# Altium PCB RP2040_Instant_Tankless_Water_Heater.pcbdoc
Units mm, origin at the board's own origin, x right, y up, seen from the top; angles counter-clockwise.
Board outline 485.61 x 177.75 mm, 2 copper layers (Top Layer, Bottom Layer); 102 components, 83 nets, 397 pads, 33 vias.
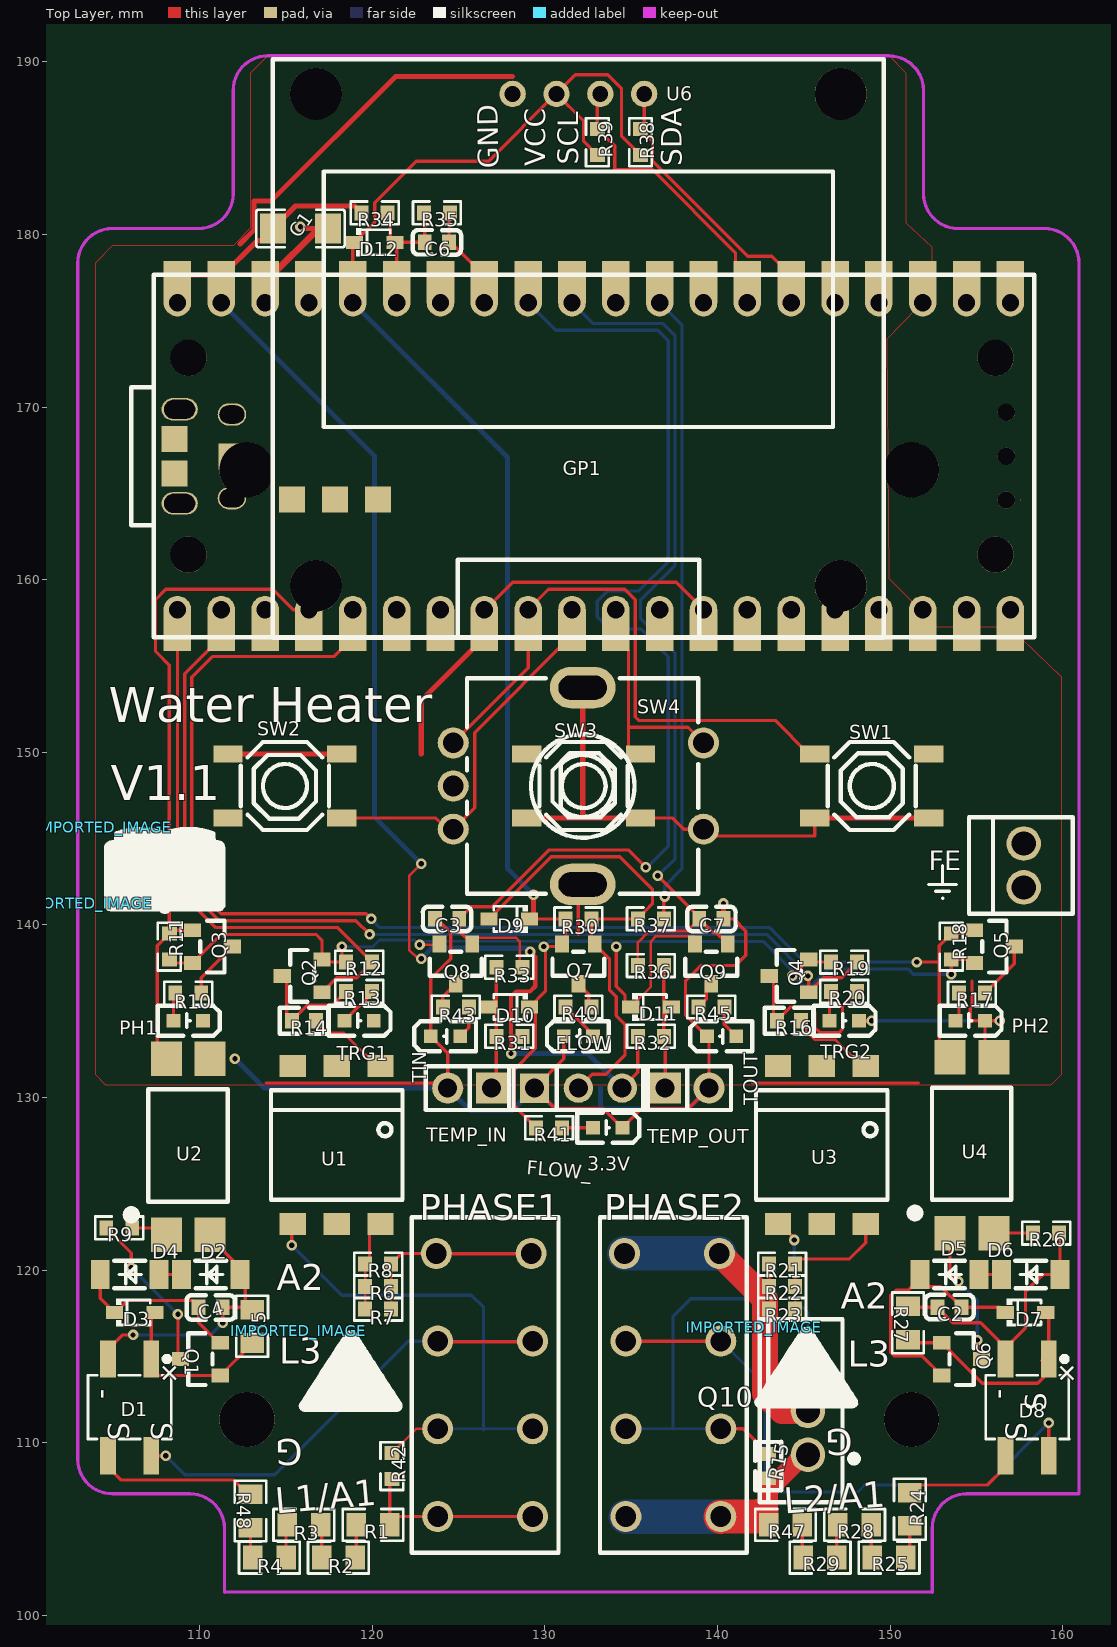
[diagram p0: Top Layer view]
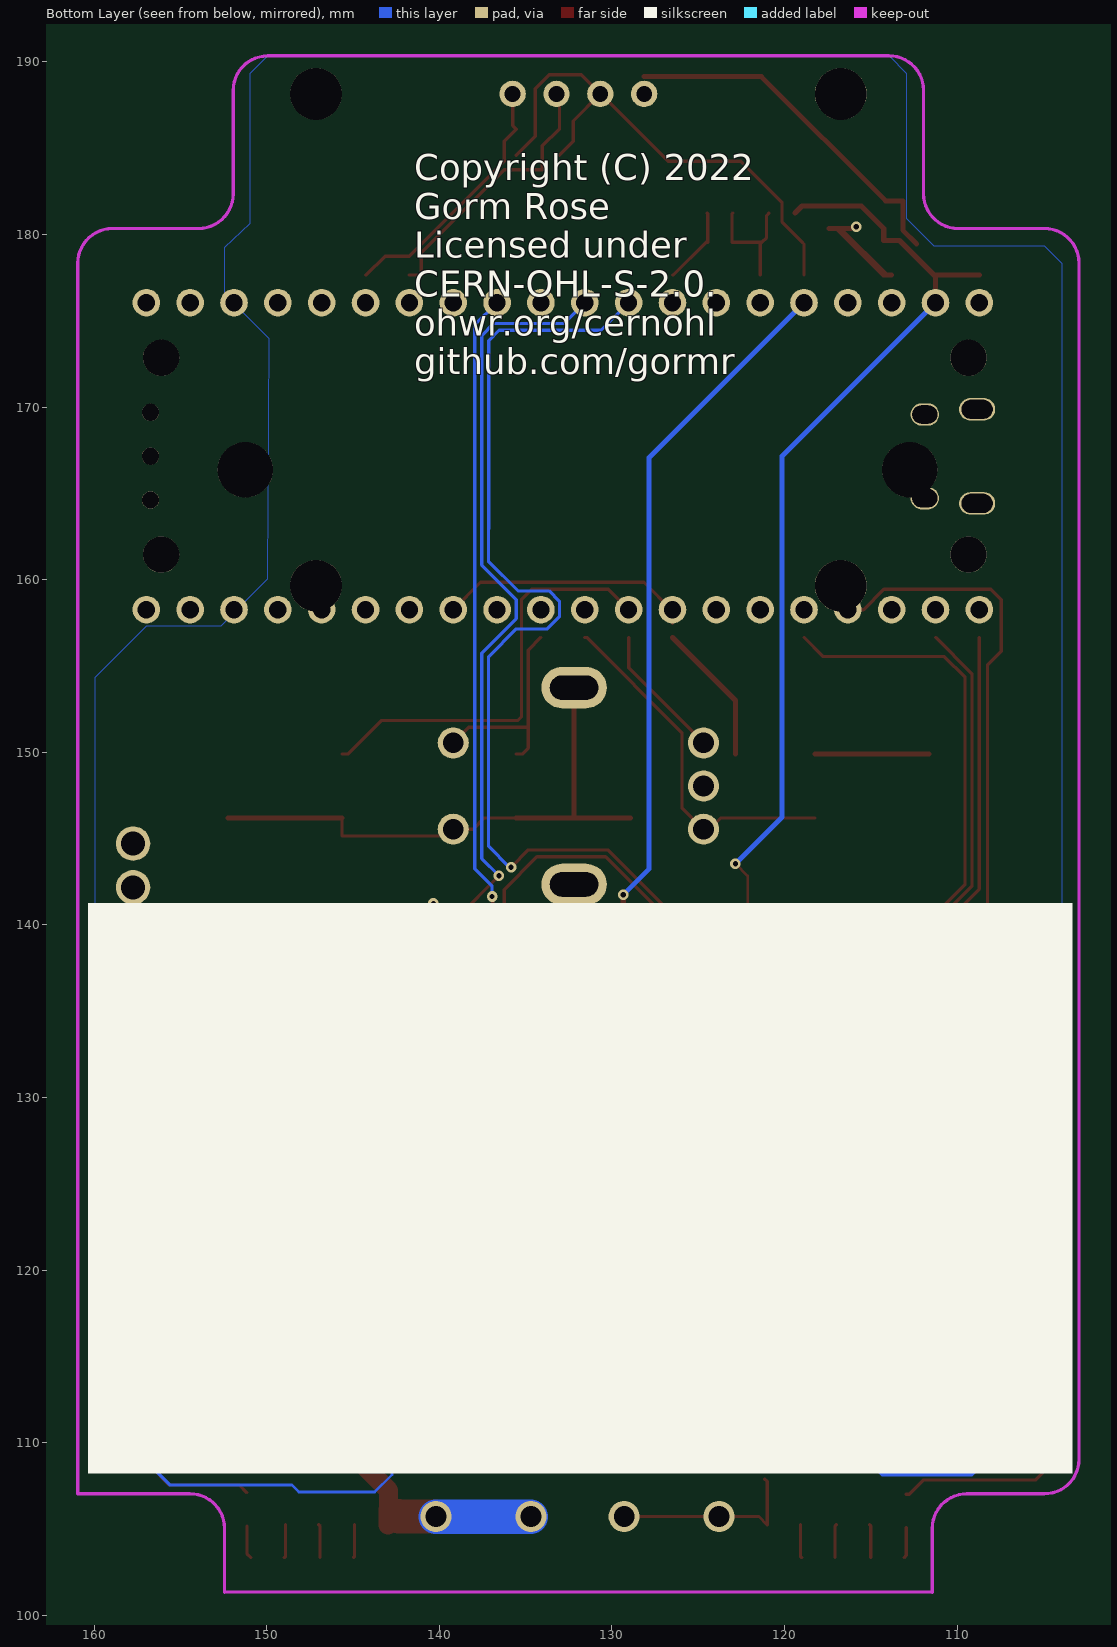
[diagram p1: Bottom Layer view, seen from below]

## Layer stack, top to bottom
Top Layer: signal copper (thickness not stored)
Dielectric: dielectric 0.32, FR-4, Dk 4.8
Bottom Layer: signal copper (thickness not stored)

## Board outline
511.014,25.4 25.4,25.4 25.4,203.148 511.014,203.148

## Components (designator, comment, footprint, x,y, rotation, side; value= is the part's Value field where it differs from the comment)
3.3V "0603White light_C2290" LED0603-R-RD_WHITE 133.643,128.25 r180 top
C1 "100uF" C1206 115.842,180.349 r180 top
C2 "100n" C0603 153.442,117.849 r0 top
C3 "100nF" C0603 124.342,140.349 r0 top
C4 "100n" C0603 110.642,117.849 r180 top
C6 "100nF" C0603 123.742,179.549 r180 top
C7 "100nF" C0603 139.642,140.349 r180 top
D1 "MB10F-46" MBF_L4.8-W3.9-P2.50-LS6.7-BL 105.942,112.049 r180 top
D2 "ZMM5V6" LL-34_L3.5-W1.5-RD 110.642,119.749 r0 top
D3 "1N5819WS" SOD-323_L1.8-W1.3-LS2.5-RD 106.242,117.549 r0 top
D4 "ZMM5V6" LL-34_L3.5-W1.5-RD 105.942,119.749 r0 top
D5 "ZMM5V6" LL-34_L3.5-W1.5-RD 153.442,119.749 r0 top
D6 "ZMM5V6" LL-34_L3.5-W1.5-RD 158.142,119.749 r0 top
D7 "1N5819WS" SOD-323_L1.8-W1.3-LS2.5-RD 157.842,117.549 r0 top
D8 "MB10F-46" MBF_L4.8-W3.9-P2.50-LS6.7-BL 157.942,112.049 r180 top
D9 "1N5819WS" SOD-323_L1.8-W1.3-LS2.5-RD 127.942,140.349 r180 top
D10 "1N5819WS" SOD-323_L1.8-W1.3-LS2.5-RD 127.942,135.249 r180 top
D11 "1N5819WS" SOD-323_L1.8-W1.3-LS2.5-RD 136.142,135.249 r0 top
D12 "1N5819WS" SOD-323_L1.8-W1.3-LS2.5-RD 120.142,179.549 r0 top
FE "Screw_Terminal_1x01" 640454-2P 157.742,143.449 r90 top
FLOW "19-213/Y2C-CQ2R2L/3T(CY)" LED0603-R-RD 131.941,133.548 r0 top
FLOW_ "A2541WV-3P_C609572" HDR-TH_3P-P2.54-V-M 131.941,130.549 r0 top
GP1 "RASPBERRY PI PICO" "RASPBERRY PI PICO" 158.342,156.649 r90 top
IMPORTED_IMAGE "IMPORTED_IMAGE" IMPORTED_IMAGE 103.342,141.249 r0 top
IMPORTED_IMAGE "IMPORTED_IMAGE" IMPORTED_IMAGE 115.742,116.499 r0 top
IMPORTED_IMAGE "IMPORTED_IMAGE" IMPORTED_IMAGE 142.142,116.699 r0 top
IMPORTED_IMAGE "IMPORTED_IMAGE" IMPORTED_IMAGE 104.487,145.654 r0 top
PH1 "19-213/Y2C-CQ2R2L/3T(CY)" LED0603-R-RD 109.343,134.448 r180 top
PH2 "19-213/Y2C-CQ2R2L/3T(CY)" LED0603-R-RD 154.641,134.448 r180 top
PHASE1 "LSF-SMT_5.08_04_180" LSF-SMT_5.08_04_180 126.542,113.349 r180 top
PHASE2 "LSF-SMT_5.08_04_180" LSF-SMT_5.08_04_180 137.442,113.349 r180 top
Q1 "LBSS84LT1G" SOT-23_L2.9-W1.3-P1.90-LS2.4-BR 110.042,114.849 r0 top
Q2 "LBSS84LT1G" SOT-23_L2.9-W1.3-P1.90-LS2.4-BR 115.942,137.049 r0 top
Q3 "LBSS84LT1G" SOT-23_L2.9-W1.3-P1.90-LS2.4-BR 110.742,138.749 r180 top
Q4 "LBSS84LT1G" SOT-23_L2.9-W1.3-P1.90-LS2.4-BR 144.142,137.049 r0 top
Q5 "LBSS84LT1G" SOT-23_L2.9-W1.3-P1.90-LS2.4-BR 156.042,138.749 r180 top
Q6 "LBSS84LT1G" SOT-23_L2.9-W1.3-P1.90-LS2.4-BR 154.142,114.849 r180 top
Q7 "LBSS84LT1G" SOT-23_L2.9-W1.3-P1.90-LS2.4-BR 131.942,137.749 r90 top
Q8 "LBSS84LT1G" SOT-23_L2.9-W1.3-P1.90-LS2.4-BR 124.842,137.749 r90 top
Q9 "LBSS84LT1G" SOT-23_L2.9-W1.3-P1.90-LS2.4-BR 139.642,137.749 r90 top
Q10 "(external or aux)" PG-TO220-3_L10.0-W4.5-P2.54-L 145.242,111.849 r90 top
R1 "220kΩ" R0805 120.042,105.249 r180 top
R2 "220kΩ" R0805 118.042,103.349 r180 top
R3 "220kΩ" R0805 116.042,105.249 r180 top
R4 "220kΩ" R0805 114.042,103.349 r180 top
R5 "220kΩ" R0805 113.042,116.749 r270 top
R6 "1kΩ" R0603#1 120.342,119.049 r180 top
R7 "1kΩ" R0603#1 120.342,117.749 r180 top
R8 "1kΩ" R0603#1 120.342,120.349 r180 top
R9 "1kΩ" R0603#1 105.342,122.449 r180 top
R10 "2.2kΩ" R0603#1 109.342,136.049 r0 top
R11 "10kΩ" R0603#1 108.242,138.749 r270 top
R12 "10kΩ" R0603#1 119.242,137.849 r0 top
R13 "2.2kΩ" R0603#1 119.242,136.149 r180 top
R14 "220R" R0603#2 116.042,134.449 r180 top
R15 "1k" R0603#2 142.942,108.649 r270 top
R16 "220R" R0603#2 144.142,134.449 r180 top
R17 "2.2kΩ" R0603#1 154.742,136.049 r0 top
R18 "10kΩ" R0603#1 153.542,138.749 r270 top
R19 "10kΩ" R0603#1 147.342,137.849 r0 top
R20 "2.2kΩ" R0603#1 147.342,136.149 r0 top
R21 "1kΩ" R0603#1 143.742,120.349 r0 top
R22 "1kΩ" R0603#1 143.742,119.049 r0 top
R23 "1kΩ" R0603#1 143.742,117.749 r0 top
R24 "220kΩ" R0805 151.142,106.149 r90 top
R25 "220kΩ" R0805 149.942,103.349 r0 top
R26 "1kΩ" R0603#1 159.042,122.149 r180 top
R27 "220kΩ" R0805 151.042,116.949 r270 top
R28 "220kΩ" R0805 147.942,105.249 r0 top
R29 "220kΩ" R0805 145.942,103.349 r0 top
R30 "2.2kΩ" R0603#1 131.942,140.349 r0 top
R31 "39kΩ" R0603#1 127.943,133.548 r0 top
R32 "39kΩ" R0603#1 136.142,133.548 r0 top
R33 "10kΩ" R0603#1 127.942,137.549 r0 top
R34 "10kΩ" R0603#1 120.142,181.249 r180 top
R35 "10kΩ" R0603#1 123.742,181.249 r180 top
R36 "10kΩ" R0603#1 136.142,137.649 r180 top
R37 "10kΩ" R0603#1 136.142,140.349 r0 top
R38 "2.2kΩ" R0603#1 135.542,185.349 r270 top
R39 "2.2kΩ" R0603#1 133.042,185.349 r270 top
R40 "2.2kΩ" R0603#1 131.942,135.249 r0 top
R41 "2.2kΩ" R0603#1 130.242,128.249 r180 top
R42 "1kΩ" R0603#1 121.142,108.649 r270 top
R43 "2.2kΩ" R0603#1 124.842,135.249 r180 top
R45 "2.2kΩ" R0603#1 139.642,135.249 r180 top
R47 "220kΩ" R0805 143.942,105.249 r0 top
R48 "220kΩ" R0805 112.942,106.049 r90 top
SW1 "TS-1187A-B-A-B" SW-SMD_4P-L5.1-W5.1-P3.70-LS6.5-TL-2 148.942,148.049 r180 top
SW2 "TS-1187A-B-A-B" SW-SMD_4P-L5.1-W5.1-P3.70-LS6.5-TL-2 114.942,148.049 r0 top
SW3 "TS-1187A-B-A-B" SW-SMD_4P-L5.1-W5.1-P3.70-LS6.5-TL-2 132.242,148.049 r180 top
SW4 "PEC11R-4015F-S0024" SW-TH_PEC11R-4XXXF-SXXXX 131.942,148.049 r270 top
TEMP_IN "A2541WV-2P" HDR-TH_P2.54-H-M_A2541WV-2P 125.642,130.549 r180 top
TEMP_OUT "A2541WV-2P" HDR-TH_P2.54-H-M_A2541WV-2P 138.243,130.549 r0 top
TIN "19-213/Y2C-CQ2R2L/3T(CY)" LED0603-R-RD 124.243,133.548 r0 top
TOUT "19-213/Y2C-CQ2R2L/3T(CY)" LED0603-R-RD 140.242,133.548 r0 top
TRG1 "XL-1608UOC-06" LED0603-R-RD_ORANGE 119.241,134.448 r180 top
TRG2 "XL-1608UOC-06" LED0603-R-RD_ORANGE 147.341,134.448 r180 top
U1 "MOC3063S" DIP8SMD 117.942,127.249 r180 top
U2 "BPC-817S/A" SOP-4_L6.5-W4.6-P2.54-LS10.2-BR 109.342,127.149 r270 top
U3 "MOC3063S" DIP8SMD 146.042,127.249 r180 top
U4 "BPC-817S/A" SOP-4_L6.5-W4.6-P2.54-LS10.2-BR 154.742,127.249 r270 top
U6 "SSH1106 128X64 1.3 I2C DISPLAY MODULE" "SSH1106 128X64 1.3 I2C OLED DISPLAY MODULE" 131.942,188.149 r0 top

## Footprints (in the part's own frame and the unit in brackets; to place one, negate y for a bottom-side part, rotate by r counter-clockwise, add the part's x,y. Pads: shape width x height; smd on the part's side, far side on the other; paste and mask are expansions set on the pad)
640454-2P [mm]
  round 2 hole 1.4: 1(1.27,0) 2(-1.27,0)
  silkscreen extent -2.79,-2.83 2.79,3.17
C0603 [mm]
  rect 0.8x0.9 smd: 1(-0.7,0) 2(0.7,0)
  silkscreen extent -1.4,-0.7 1.4,0.72
C1206 [mm]
  rect 1.485x1.728 smd: 1(-1.593,0) 2(1.593,0)
  silkscreen extent -2.56,-1.09 2.56,1.09
DIP8SMD [mil]
  rect 60x50 smd: 1(-100,-180) 2(0,-180) 3(100,-180) 4(100,180) 5(0,180) 6(-100,180)
  silkscreen extent -150,-125 150,125
HDR-TH_3P-P2.54-V-M [mm]
  rect 1.7x1.7 hole 1.1: 1(-2.54,0)
  round 1.7 hole 1.1: 2(0,0) 3(2.54,0)
  silkscreen extent -4.02,-1.27 4.02,1.27
HDR-TH_P2.54-H-M_A2541WV-2P [mm]
  rect 1.8x1.8 hole 1.1: 1(-1.27,0)
  round 1.8 hole 1.1: 2(1.27,0)
  silkscreen extent -2.54,-1.27 2.54,1.27
IMPORTED_IMAGE [mm]
LED0603-R-RD [mm]
  rect 0.8x0.8 smd: 1(0.851,0) 2(-0.851,0)
  silkscreen extent -1.82,-0.86 1.77,0.86
LED0603-R-RD_ORANGE [mm]
  rect 0.8x0.8 smd: 1(0.851,0) 2(-0.851,0)
  silkscreen extent -1.82,-0.86 1.77,0.86
LED0603-R-RD_WHITE [mm]
  rect 0.8x0.8 smd: 1(0.851,0) 2(-0.851,0)
  silkscreen extent -1.82,-0.86 1.77,0.86
LL-34_L3.5-W1.5-RD [mm]
  rect 1.1x1.7 smd: 1(-1.7,0) 2(1.7,0)
  silkscreen extent -0.9,-0.8 0.9,0.8
LSF-SMT_5.08_04_180 [mm]
  round 1.8 hole 1.2: 1(-2.75,7.62) 1(2.75,7.62) 2(-2.75,2.54) 2(2.75,2.54) 3(-2.75,-2.54) 3(2.75,-2.54) 4(-2.667,-7.62) 4(2.833,-7.62)
  silkscreen extent -4.25,-9.72 4.25,9.72
MBF_L4.8-W3.9-P2.50-LS6.7-BL [mm]
  rect 0.91x2.165 smd: 1(1.25,2.807) 2(-1.25,2.807) 3(-1.25,-2.807) 4(1.25,-2.807)
  silkscreen extent -2.43,-2.96 2.41,1.85
PG-TO220-3_L10.0-W4.5-P2.54-L [mm]
  round 2 hole 1.4: 1(-2.54,0) 2(0,0) 3(2.54,0)
  silkscreen extent -5.3,-2.86 5.3,2.8
R0603#1 [mm]
  rect 0.806x0.864 smd: 1(-0.753,0) 2(0.753,0)
  silkscreen extent -1.39,-0.66 1.39,0.66
R0603#2 [mm]
  rect 0.8x0.9 smd: 1(-0.7,0) 2(0.7,0)
  silkscreen extent -1.4,-0.75 1.4,0.76
R0805 [mm]
  rect 1.133x1.377 smd: 1(-0.966,0) 2(0.966,0)
  silkscreen extent -1.76,-0.92 1.76,0.92
"RASPBERRY PI PICO" [mm]
  rect 1.6x1.6 smd: 1(0.01,49.63) 1(0.815,49.63) 2(0.01,47.09) 2(0.815,47.09) 3(0.01,44.55) 3(0.815,44.55) 4(0.01,42.01) 4(0.815,42.01) 5(0.01,39.47) 5(0.815,39.47) 6(0.01,36.93) 6(0.815,36.93) 7(0.01,34.39) 7(0.815,34.39) 8(0.01,31.85) 8(0.815,31.85) 9(0.01,29.31) 9(0.815,29.31) 10(0.01,26.77) 10(0.815,26.77) 11(0.01,24.23) 11(0.815,24.23) 12(0.01,21.69) 12(0.815,21.69) 13(0.01,19.15) 13(0.815,19.15) 14(0.01,16.61) 14(0.815,16.61) 15(0.01,14.07) 15(0.815,14.07) 16(0.01,11.53) 16(0.815,11.53) 17(0.01,8.99) 17(0.815,8.99) 18(0.01,6.45) 18(0.815,6.45) 19(0.01,3.91) 19(0.815,3.91) 20(0.01,1.37) 20(0.815,1.37) 21(20.205,1.37) 21(21.01,1.37) 22(20.205,3.91) 22(21.01,3.91) 23(20.205,6.45) 23(21.01,6.45) 24(20.205,8.99) 24(21.01,8.99) 25(20.205,11.53) 25(21.01,11.53) 26(20.205,14.07) 26(21.01,14.07) 27(20.205,16.61) 27(21.01,16.61) 28(20.205,19.15) 28(21.01,19.15) 29(20.205,21.69) 29(21.01,21.69) 30(20.205,24.23) 30(21.01,24.23) 31(20.205,26.77) 31(21.01,26.77) 32(20.205,29.31) 32(21.01,29.31) 33(20.205,31.85) 33(21.01,31.85) 34(20.205,34.39) 34(21.01,34.39) 35(20.205,36.93) 35(21.01,36.93) 36(20.205,39.47) 36(21.01,39.47) 37(20.205,42.01) 37(21.01,42.01) 38(20.205,44.55) 38(21.01,44.55) 39(20.205,47.09) 39(21.01,47.09) 40(20.205,49.63) 40(21.01,49.63)
  round 1.6 hole 1: 1(1.62,49.63) 2(1.62,47.09) 3(1.62,44.55) 4(1.62,42.01) 5(1.62,39.47) 6(1.62,36.93) 7(1.62,34.39) 8(1.62,31.85) 9(1.62,29.31) 10(1.62,26.77) 11(1.62,24.23) 12(1.62,21.69) 13(1.62,19.15) 14(1.62,16.61) 15(1.62,14.07) 16(1.62,11.53) 17(1.62,8.99) 18(1.62,6.45) 19(1.62,3.91) 20(1.62,1.37) 21(19.4,1.37) 22(19.4,3.91) 23(19.4,6.45) 24(19.4,8.99) 25(19.4,11.53) 26(19.4,14.07) 27(19.4,16.61) 28(19.4,19.15) 29(19.4,21.69) 30(19.4,24.23) 31(19.4,26.77) 32(19.4,29.31) 33(19.4,31.85) 34(19.4,34.39) 35(19.4,36.93) 36(19.4,39.47) 37(19.4,42.01) 38(19.4,44.55) 39(19.4,47.09) 40(19.4,49.63)
  rect 0.01x0.01 smd: 41(7.97,0) 41(7.97,0.805) 42(10.51,0) 42(10.51,0.805) 43(13.05,0) 43(13.05,0.805)
  round 1 hole 1 unplated: 41(7.97,1.61) 42(10.51,1.61) 43(13.05,1.61)
  rect 1.5x1.5 smd: 44(10.5,46.5) 45(9.5,49.8) 46(11.5,49.8) 47(8,43) 48(8,40.5) 49(8,38)
  oval 1.3x2.1 hole 1.1 slot 1.8 at 90 deg: 50(7.775,49.5) 50(13.225,49.5)
  oval 1.3x1.65 hole 1.05 slot 1.45 at 90 deg: 50(8.075,46.47) 50(12.925,46.47)
  round 2.1 hole 2.1 unplated: ""(4.81,49) ""(4.81,2.23) ""(16.21,49) ""(16.21,2.23)
  silkscreen extent 0.01,0 21.01,52.3
SOD-323_L1.8-W1.3-LS2.5-RD [mm]
  rect 1x0.75 smd: 1(-1.173,0) 2(1.173,0)
  silkscreen extent -1.08,-0.8 0.9,0.8
SOP-4_L6.5-W4.6-P2.54-LS10.2-BR [mm]
  rect 2x1.8 smd: 1(5.1,-1.27) 2(5.1,1.27) 3(-5.1,1.27) 4(-5.1,-1.27)
  silkscreen extent -3.32,-3.79 4.42,2.29
SOT-23_L2.9-W1.3-P1.90-LS2.4-BR [mm]
  rect 1x0.8 smd: 1(1.15,-0.95) 2(1.15,0.95) 3(-1.15,0)
  silkscreen extent -0.7,-1.5 0.7,1.5
"SSH1106 128X64 1.3 I2C OLED DISPLAY MODULE" [mm]
  round 1.524 hole 0.914: 1(3.81,0) 2(1.27,0) 3(-1.27,0) 4(-3.81,0)
  round 3 hole 3 unplated: ""(-15.2,-28.5) ""(-15.2,0) ""(15.2,-28.5) ""(15.2,0)
  silkscreen extent -17.7,-31.5 17.7,2
SW-SMD_4P-L5.1-W5.1-P3.70-LS6.5-TL-2 [mm]
  rect 1.7x1 smd: 1(-3.3,1.849) 2(3.3,1.85) 3(-3.3,-1.85) 4(3.3,-1.85)
  silkscreen extent -2.55,-2.55 2.55,2.55
SW-TH_PEC11R-4XXXF-SXXXX [mm]
  round 1.8 hole 1.2: 1(-2.5,7.25) 2(2.5,7.25) A(-2.5,-7.25) B(2.5,-7.25) C(0,-7.25)
  oval 2.4x3.8 hole 1.4 slot 2.8 at 90 deg: MT1(-5.7,0.25) MT2(5.7,0.25)
  silkscreen extent -6.25,-6.45 6.25,6.95

## Free pads (board coordinates)
  round 3.2 hole 3.2 unplated: ""(112.742,111.349) ""(112.742,166.371) ""(151.242,111.349) ""(151.242,166.371)

## Via types
v1: diameter 0.61, hole 0.305, Top Layer to Bottom Layer, tented both sides, 33 vias

## Nets (pads, with @x,y where several pads share a name; then routed paths per layer and width w, separated by ;. In a path a pad name is that pad's centre, name@x,y a point inside that pad or via, vN(x,y) a via of type N, cw(c..) or ccw(c..) an arc to the next point about the centre after c; other vN are vias at no path point)
+3V3: D9.1 D10.1 D11.1 D12.1 GP1.36 Q2.2 Q3.2 Q4.2 Q5.2 Q7.2 Q8.2 Q9.2 R11.2 R12.1 R18.2 R19.1 R30.1 R38.2 R39.2 R41.2 U6.3 | length 158.3
  Top Layer w0.149: v1(122.742,138.849) 123.842,138.849 Q8.2 ; D11.1@134.969,135.248 136.142,136.421 136.142,139.05 136.442,139.35 138.693,139.35 Q9.2@138.693,138.898
  Top Layer w0.19: R11.2 108.439,137.799 Q3.2@109.592,137.799 ; Q3.2 111.243,139.449 116.742,139.449 117.092,139.098 Q2.2 117.242,137.849 R12.1 118.242,138.095 v1@118.242,138.749 ; GP1.36@118.872,177.659 118.872,179.451 D12.1 ; D12.1 120.143,180.721 120.143,181.849 122.543,184.249 126.742,184.249 130.671,188.179 U6.3 ; D9.1 R30.1 131.189,139.095 Q7.2 130.842,138.749 v1@129.942,138.749 ; R41.2@129.488,128.25 128.243,129.495 128.243,131.648 129.442,132.85 129.442,134.923 129.114,135.248 130.041,136.177 130.041,138.748 130.991,138.748 Q7.2@130.991,138.898 ; R39.2@133.041,184.595 132.241,185.397 132.241,186.576 130.671,188.148 131.771,189.248 133.643,189.248 134.443,188.448 134.443,185.695 R38.2 ; v1@134.141,138.748 134.141,136.449 134.641,135.949 134.641,135.248 D11.1@134.969,135.248 ; v1(144.342,137.049) Q4.2 145.442,137.849 R19.1 ; v1(153.542,137.149) R18.2 154.695,137.995 Q5.2@154.892,137.799
  Top Layer w0.29: D9.1@129.114,140.348 129.343,140.348 v1@129.343,141.748
  Bottom Layer w0.149: v1(118.242,138.749) 120.042,138.749 120.423,139.13 122.461,139.13 v1(122.742,138.849) 122.942,139.049 129.642,139.049 v1(129.942,138.749)
  Bottom Layer w0.19: v1@129.942,138.749 130.242,139.049 131.642,139.049 133.842,139.049 v1@134.142,138.749 ; v1@134.141,138.748 134.443,139.048 142.642,139.048 144.342,137.348 144.342,137.049 144.941,136.449 145.441,136.449 146.442,137.45 151.042,137.45 151.342,137.15 v1@153.541,137.15
  Bottom Layer w0.29: GP1.36@118.873,176.048 127.842,167.079 127.842,143.249 v1@129.343,141.748
  other v1: 134.142,138.749 129.342,141.749
+5V: C1.2 FLOW_.3 GP1.39 GP1.40 R31.2 R32.1 R34.2 | length 83
  Top Layer w0.149: v1(122.842,138.049) 122.642,138.049 122.142,138.549 122.142,142.849 v1(122.842,143.549)
  Top Layer w0.19: FLOW_.3 135.389,131.456 R32.1
  Top Layer w0.25: v1(128.042,132.549) 128.042,135.849 128.342,136.149 129.142,136.149 129.442,136.449 129.442,138.149 v1(129.142,138.449) ; 128.042,133.548 R31.2
  Top Layer w0.29: C1.2 115.55,181.649 118.989,181.649 R34.2
  Top Layer w0.3: GP1.40@108.712,177.659 GP1.39@111.252,177.659 ; GP1.39@111.253,176.048 111.253,177.559 113.343,179.649 114.25,179.649 C1.2
  Bottom Layer w0.29: GP1.39@111.252,176.049 120.142,167.159 120.142,146.249 v1(122.842,143.549)
  Bottom Layer w0.3: v1(122.842,138.049) 123.442,138.649 124.942,138.649 128.942,138.649 v1(129.142,138.449) ; v1(128.042,132.549) 132.482,132.549 FLOW_.3@134.482,130.549
A: GP1.9 SW1.4 SW4.A | length 32.9
  Top Layer w0.19: SW4.A 129.032,154.889 GP1.9@129.032,156.659 ; GP1.9@129.033,158.268 130.212,159.449 134.641,159.449 135.243,158.849 135.243,152.047 135.441,151.849 143.341,151.849 145.292,149.898 SW1.4
A2: PHASE1.4 R6.1 R7.1 R8.1 | length 11
  Top Layer w0.149: R7.1 R8.1
  Top Layer w0.19: R8.1 121.715,120.969 PHASE1.4@123.709,120.969 ; PHASE1.4@123.742,120.949 PHASE1.4@129.242,120.949
A2.: PHASE2.4 Q10.2 R21.1 R22.1 R23.1 | length 20.2
  Top Layer w0.19: R23.1 R21.1
  Top Layer w1.5: PHASE2.4@140.109,120.969 142.742,118.336 142.742,112.849 143.742,111.849 Q10.2
  Bottom Layer w2: PHASE2.4@134.609,120.969 PHASE2.4@140.109,120.969
B: GP1.10 SW2.4 SW4.B | length 20.7
  Top Layer w0.19: SW2.4 123.691,146.198 124.342,145.55 SW4.B ; SW4.B 125.942,146.799 125.942,151.149 131.452,156.659 GP1.10@131.572,156.659
C: GP1.11 SW3.3 SW4.1 | length 12.3
  Top Layer w0.19: GP1.11@134.113,156.66 134.842,155.928 134.842,150.249 135.192,149.898 SW3.3 ; 134.842,151.449 138.292,151.449 SW4.1
C4_2: C4.2 D3.1 D4.1 Q1.2 | length 10.5
  Top Layer w0.19: D4.1 104.242,118.376 D3.1 105.142,117.549 105.842,118.249 109.542,118.249 C4.2 109.942,116.949 111.092,115.799 Q1.2
D1_1: D1.1 R48.2 | length 9.5
  Top Layer w0.19: D1.1 104.692,108.599 105.442,107.849 111.942,107.849 112.776,107.015 R48.2
D1_3: D1.3 D3.2 Q1.1 R5.2 | length 10.4
  Top Layer w0.19: D3.2 107.192,117.326 D1.3 107.192,113.899 Q1.1 113.042,115.749 R5.2
D1_4: C4.1 D1.4 D2.2 R5.1 U2.2 | length 17
  Top Layer w0.19: D1.4 104.692,115.399 105.542,116.249 v1(106.142,116.249) ; U2.2 110.613,121.88 112.343,120.15 D2.2 112.642,119.749 112.642,117.849 C4.1 ; v1(111.342,116.949) C4.1 ; R5.1 112.908,117.849 C4.1
  Bottom Layer w0.19: v1(106.142,116.249) 110.641,116.248 v1(111.342,116.949)
D2_1: D2.1 D4.2 | length 1.3
  Top Layer w0.19: D4.2 D2.1
D5_2: D5.2 D6.1 | length 1.3
  Top Layer w0.19: D5.2@155.142,119.749 D6.1
D6_2: C2.1 D6.2 D8.4 R26.1 R27.1 | length 16.5
  Top Layer w0.19: R27.1 151.108,117.849 C2.1 153.642,116.949 155.242,116.949 D8.4@156.692,115.499 ; R26.1 159.842,122.102 D6.2 158.842,119.749 157.842,118.749 157.842,116.649 D8.4@156.692,115.499 ; D8.4@156.692,115.499 D8.4 D8.4@156.692,115.499
D8_1: D8.1 R24.2 | length 6.8
  Top Layer w0.19: R24.2 151.576,107.549 155.642,107.549 156.692,108.599 D8.1
D9_2: D9.2 FLOW_.2 Q7.1 R30.2 R37.1 | length 28.7
  Top Layer w0.19: D9.2 130.369,143.95 134.342,143.95 136.241,142.05 136.242,141.249 R37.1@135.388,140.348 ; FLOW_.2 132.741,131.349 133.541,131.349 134.641,132.449 134.641,134.249 134.141,134.75 134.141,135.85 133.742,136.248 133.742,138.049 Q7.1@132.891,138.898 ; Q7.1 132.695,139.095 R30.2 R37.1
D10_2: D10.2 R31.1 R33.1 TEMP_IN.1 | length 8.1
  Top Layer w0.19: D10.2 127.189,135.668 R33.1 ; TEMP_IN.1 127.189,130.825 127.189,136.103
D11_2: D11.2 R32.2 R36.1 TEMP_OUT.1 | length 7.5
  Top Layer w0.19: R32.2 136.895,134.829 D11.2 136.895,135.668 R36.1 ; R32.2 136.972,133.472 TEMP_OUT.1
FE: 3.3V.2 C1.1 C3.1 C6.1 C7.1 FE.1 FLOW.2 FLOW_.1 GP1.3 GP1.8 GP1.13 GP1.18 GP1.23 GP1.28 GP1.33 GP1.38 PH1.2 PH2.2 R35.1 SW1.1 SW1.2 SW2.1 SW2.2 SW3.1 SW3.2 SW4.2 SW4.C SW4.MT1 SW4.MT2 TEMP_IN.2 TEMP_OUT.2 TIN.2 TOUT.2 TRG1.2 TRG2.2 U1.2 U2.3 U3.2 U4.3 U6.4 | length 209.7
  Top Layer w0.19: GP1.38@113.793,177.658 114.052,177.658 116.742,180.348 C1.1 ; 113.842,130.849 120.481,130.848 124.372,130.848 TEMP_IN.2 124.372,132.568 TIN.2 123.391,136.898 124.542,138.049 124.542,139.549 123.742,140.349 C3.1 ; R35.1 124.442,181.195 C6.1 124.542,179.549 126.432,177.659 GP1.33@126.492,177.659 ; GP1.8@126.493,157.463 126.493,158.199 128.141,159.848 137.613,159.848 GP1.13@139.193,158.268 ; FLOW.2@131.091,133.549 131.091,132.238 129.402,130.549 130.603,129.35 133.394,129.35 3.3V.2 135.594,129.35 138.312,129.35 TEMP_OUT.2 ; 131.942,139.449 131.942,142.099 SW4.MT2 ; SW3.1 137.392,146.2 138.042,145.55 SW4.2 139.193,145.149 145.642,145.149 SW1.2 ; TEMP_OUT.2 139.512,133.428 TOUT.2 138.142,134.798 138.142,136.749 139.042,137.649 141.042,137.649 141.642,138.249 141.642,139.649 140.942,140.349 C7.1 ; 142.043,130.848 150.542,130.849 151.642,130.849 ; TRG2.2@148.193,134.449 v1(148.942,134.449) ; 154.742,136.749 154.742,135.249 154.642,135.149 154.642,134.449 PH2.2@155.493,134.449 ; U4.3 155.493,132.868 PH2.2@155.493,134.449 ; v1(156.342,134.449) PH2.2@155.493,134.449
  Top Layer w0.29: 112.343,179.449 113.143,180.249 113.143,181.948 114.141,181.948 121.342,189.149 128.131,189.149 ; GP1.38@113.792,177.659 114.252,177.659 116.942,180.349 C1.1 115.942,180.349 v1(115.842,180.449) ; SW1.2 SW1.1@152.241,146.2
  Top Layer w0.3: SW2.1@111.642,149.898 SW2.2 ; 122.842,149.899 122.842,153.009 GP1.8@126.492,156.659 ; SW3.2@128.942,146.198 SW3.1 ; SW4.MT1 132.192,146.235 132.228,146.199 ; C7.1 v1(140.342,141.249)
  Bottom Layer w0.19: v1(148.942,134.449) v1(156.342,134.449)
  Bottom Layer w0.29: FLOW_.1@129.402,130.549 130.602,129.349 138.312,129.349 TEMP_OUT.2 ; 133.216,129.349 133.216,130.549
  Bottom Layer w0.3: v1(112.042,132.249) 113.742,130.549 TEMP_IN.2 125.672,129.249 128.102,129.249 FLOW_.1@129.402,130.549
FLOW: GP1.29 R37.2 | length 36.7
  Top Layer w0.19: R37.2 136.895,141.602 v1(136.942,141.649)
  Bottom Layer w0.19: GP1.29@136.653,176.048 137.941,174.76 137.941,143.249 136.943,142.248 v1(136.942,141.649)
G: PHASE1.2 R42.1 U1.4 | length 29.7
  Top Layer w0.149: R42.1 122.549,110.809 PHASE1.2@123.792,110.809
  Top Layer w0.19: v1@115.342,121.449 115.342,122.617 U1.4
  Bottom Layer w0.149: PHASE1.2@123.792,110.809 PHASE1.2@129.292,110.809
  Bottom Layer w0.19: v1(115.342,121.449) 118.242,118.549 125.742,118.549 126.451,117.84 126.451,110.749
G.: PHASE2.2 Q10.3 R15.1 U3.4 | length 35.3
  Top Layer w0.19: PHASE2.2@140.192,110.809 141.482,110.809 R15.1 ; U3.4 143.613,122.677 144.443,121.849 v1@144.443,121.748
  Bottom Layer w0.149: PHASE2.2@134.692,110.809 PHASE2.2@140.192,110.809 ; v1@144.443,121.748 144.443,118.349 145.243,117.549 Q10.3
  Bottom Layer w0.19: 137.428,110.808 137.428,117.333 138.441,118.349 144.443,118.349 v1@144.443,121.748
  other v1: 144.442,121.749
L1/A1: PHASE1.1 R1.1 R42.2 | length 11.2
  Top Layer w0.149: R1.1 121.488,105.729 PHASE1.1@129.292,105.729
  Top Layer w0.19: R1.1 121.008,107.762 R42.2
L2/A1: PHASE2.1 Q10.1 R15.2 R47.1 | length 12.8
  Top Layer w1.1: R47.1 142.942,107.249 145.002,109.309 Q10.1
  Top Layer w2: PHASE2.1@140.192,105.729 142.342,105.749
  Bottom Layer w2: PHASE2.1@134.692,105.729 PHASE2.1@140.192,105.729
L3: D1.2 PHASE1.3 | length 25.8
  Top Layer w0.19: D1.2 107.199,109.249 v1(108.042,109.249) ; PHASE1.3@123.842,115.849 PHASE1.3@129.342,115.849
  Bottom Layer w0.19: v1(108.042,109.249) 109.142,108.149 114.342,108.149 122.082,115.889 PHASE1.3@123.792,115.889
L3.: D8.2 PHASE2.3 | length 34.7
  Top Layer w0.19: PHASE2.3@134.692,115.889 PHASE2.3@140.192,115.889 ; D8.2 v1(159.192,111.149)
  Bottom Layer w0.149: PHASE2.3@140.192,115.889 142.742,113.339 142.742,108.149 143.742,107.149 148.132,107.149 148.533,107.549
  Bottom Layer w0.19: 148.533,107.549 155.591,107.549 v1(159.192,111.149)
Q1_3: Q1.3 R9.2 | length 9.4
  Top Layer w0.19: R9.2 106.042,120.995 v1(106.042,120.149) ; v1(108.742,117.449) 108.742,114.999 Q1.3
  Bottom Layer w0.19: v1(106.042,120.149) v1(108.742,117.449)
Q3_3: Q3.3 R10.2 | length 3.4
  Top Layer w0.19: R10.2 110.095,136.952 Q3.3@111.892,138.749
Q4_3: Q4.3 R16.2 R20.2 | length 10.8
  Top Layer w0.19: Q4.3 143.242,136.8 143.242,134.549 143.341,134.448 R16.2@143.442,134.448 ; R16.2 144.242,135.249 145.342,135.249 145.642,134.949 145.642,134.049 145.942,133.749 147.042,133.749 147.242,133.949 147.242,135.295 R20.2
Q5_3: Q5.3 R17.2 | length 3.4
  Top Layer w0.19: R17.2 157.192,137.745 Q5.3@157.192,138.749
Q6_1: D7.2 D8.3 Q6.1 R27.2 | length 13.4
  Top Layer w0.19: R27.2 151.226,115.799 Q6.1 155.342,113.449 158.542,113.449 159.192,114.099 D8.3 ; D8.3@158.792,114.764 159.1,114.764 D8.3 ; D7.2 159.192,117.371 D8.3
Q6_2: C2.2 D5.1 D7.1 Q6.2 | length 15.3
  Top Layer w0.19: D5.1 151.742,119.549 151.042,118.849 150.342,118.849 150.042,118.549 150.042,115.249 150.242,115.049 151.842,115.049 Q6.2 ; D5.1 151.743,119.149 151.842,119.048 152.942,119.048 C2.2@154.141,117.849 ; C2.2 156.369,117.849 D7.1
Q6_3: Q6.3 U4.1 | length 8
  Top Layer w0.19: U4.1 153.472,119.819 v1(153.942,119.349) ; v1(155.042,115.949) 155.092,115.899 Q6.3@155.092,114.849
  Bottom Layer w0.19: v1(153.942,119.349) 155.042,118.251 v1(155.042,115.949)
Q7_3: Q7.3 R40.2 | length 1.8
  Top Layer w0.19: Q7.3@131.941,136.599 132.543,136 132.543,135.248 R40.2@132.696,135.248
R1_2: R1.2 R2.1 | length 1.9
  Top Layer w0.19: R2.1 119.076,103.416 R1.2
R2_2: R2.2 R3.1 | length 1.9
  Top Layer w0.19: R3.1 117.076,105.181 R2.2
R3_2: R3.2 R4.1 | length 1.9
  Top Layer w0.19: R4.1 115.008,105.181 R3.2
R4_2: R4.2 R48.1 | length 1.8
  Top Layer w0.19: R48.1 112.942,103.483 R4.2
R9_1: R9.1 U2.1 | length 2.4
  Top Layer w0.19: R9.1@106.094,122.449 108.073,122.449 U2.1
R10_1: PH1.1 R10.1 | length 1.6
  Top Layer w0.19: PH1.1@108.491,134.449 108.491,135.951 R10.1@108.589,136.049
R13_1: R13.1 TRG1.1 | length 2.4
  Top Layer w0.19: TRG1.1@118.391,134.449 119.995,136.053 R13.1
R14_2: Q2.3 R13.2 R14.2 | length 6.7
  Top Layer w0.19: Q2.3@114.791,137.049 115.043,136.8 115.043,134.75 R14.2@115.342,134.448 ; R14.2 116.242,135.349 117.689,135.349 R13.2
R16_1: R16.1 U3.1 | length 5.2
  Top Layer w0.149: R16.1@144.842,134.448 145.142,134.448 145.142,133.848 145.642,133.348 146.849,133.348 148.378,131.821 U3.1@148.581,131.821
R17_1: PH2.1 R17.1 | length 1.7
  Top Layer w0.19: PH2.1@153.791,134.449 153.989,134.646 R17.1
R20_1: R20.1 TRG2.1 | length 1.7
  Top Layer w0.19: TRG2.1@146.491,134.449 146.491,136.051 R20.1
R24_1: R24.1 R25.2 | length 1.9
  Top Layer w0.19: R25.2 151.142,103.583 R24.1
R25_1: R25.1 R28.2 | length 1.9
  Top Layer w0.19: R28.2 148.909,103.416 R25.1
R28_1: R28.1 R29.2 | length 1.9
  Top Layer w0.19: R29.2 146.908,105.181 R28.1
R29_1: R29.1 R47.2 | length 1.9
  Top Layer w0.19: R47.2 144.908,103.416 R29.1
R40_1: FLOW.1 R40.1 | length 2.4
  Top Layer w0.19: R40.1 132.793,133.645 FLOW.1@132.793,133.549
R41_1: 3.3V.1 R41.1 | length 1.8
  Top Layer w0.19: R41.1 3.3V.1
R43_2: Q8.3 R43.2 | length 1.7
  Top Layer w0.19: R43.2 124.089,135.845 Q8.3
R45_2: Q9.3 R45.2 | length 1.8
  Top Layer w0.19: R45.2@138.888,135.248 139.343,135.702 139.343,136.599 Q9.3
S$21: 
S$68: 
S$2341: 
S$2343: 
S$2347: 
S$241067: 
S$241069: 
S$255900: 
S$260024: 
S$260028: 
S$260032: 
S$260036: 
S$260058: 
S$260158: 
SCL: GP1.27 R39.1 U6.2 | length 15.9
  Top Layer w0.19: R39.1@133.041,186.101 134.042,185.149 134.042,183.749 136.241,183.749 141.042,178.948 141.042,177.658 GP1.27@141.733,177.658 ; R39.1@133.042,186.102 133.042,187.949 U6.2@133.242,188.149
SDA: GP1.26 R38.1 U6.1 | length 15
  Top Layer w0.19: U6.1 135.752,186.312 135.542,186.102 136.242,185.402 136.242,184.249 141.742,178.749 143.142,178.749 144.232,177.659 GP1.26@144.272,177.659
TEMPIN: C3.2 GP1.32 Q8.1 R33.2 | length 65
  Top Layer w0.149: Q8.1 126.142,139.249 128.342,139.249 128.542,139.049 128.542,137.549 R33.2
  Top Layer w0.19: Q8.1 125.042,139.649 C3.2 125.742,141.049 126.942,141.049 130.242,144.349 134.842,144.349 v1(135.842,143.349)
  Bottom Layer w0.19: GP1.32@129.032,176.049 130.632,174.449 135.542,174.449 136.542,174.449 137.142,173.849 137.142,162.949 ; v1@135.843,143.348 135.942,143.348 137.143,144.549 137.143,153.749 137.143,155.55 135.543,157.148 133.742,157.148 133.041,157.849 133.041,158.748 133.643,159.35 135.441,159.35 137.143,161.049 137.143,163.048
TEMPOUT: C7.2 GP1.31 Q9.1 R36.2 | length 51.3
  Top Layer w0.149: R36.2 135.389,138.995 136.042,139.649 138.242,139.649 C7.2
  Top Layer w0.19: v1(136.542,142.849) 138.942,140.449 C7.2 139.742,139.549 139.942,139.549 Q9.1
  Bottom Layer w0.19: GP1.31@131.573,176.048 132.772,174.849 136.841,174.849 137.542,174.148 137.542,160.848 135.543,158.849 135.543,157.75 137.542,155.748 137.542,143.848 v1@136.541,142.85
TIN_1: R43.1 TIN.1 | length 1.9
  Top Layer w0.19: TIN.1 125.595,134.051 R43.1
TOUT_1: R45.1 TOUT.1 | length 2
  Top Layer w0.19: R45.1 140.395,134.246 TOUT.1
TRIAC1: GP1.1 Q2.1 R12.2 | length 31.2
  Top Layer w0.19: GP1.1@108.712,156.659 108.712,142.079 110.942,139.849 117.995,139.849 R12.2 119.095,136.949 117.942,136.949 Q2.1
TRIAC2: GP1.2 Q4.1 R19.2 | length 58
  Top Layer w0.19: GP1.2@111.252,156.659 109.142,154.549 109.142,149.149 109.142,142.249 111.142,140.249 119.042,140.249 v1(119.842,139.449) ; v1(145.242,137.049) 145.292,136.999 Q4.1 146.142,136.949 147.195,136.949 R19.2
  Bottom Layer w0.19: v1(119.842,139.449) 142.842,139.449 v1(145.242,137.049)
U1_1: R14.1 U1.1 | length 4.8
  Top Layer w0.149: R14.1@116.742,134.448 117.443,133.749 118.347,133.749 120.278,131.821 U1.1@120.481,131.821
U1_6: R6.2 R7.2 R8.2 U1.6 | length 5.5
  Top Layer w0.149: R7.2 R8.2
  Top Layer w0.19: R8.2 119.843,120.602 119.843,122.35 120.171,122.677 U1.6@120.481,122.677
U3_6: R21.2 R22.2 R23.2 U3.6 | length 8.5
  Top Layer w0.149: R23.2 R21.2
  Top Layer w0.19: R21.2 144.496,120.648 147.641,120.648 148.583,121.59 U3.6
U4_2: R26.2 U4.2 | length 2.3
  Top Layer w0.19: U4.2 R26.2
UNDEFINED: 
VREF: C6.2 D12.2 GP1.35 R34.1 R35.2 | length 7.3
  Top Layer w0.19: R34.1 121.042,181.102 121.042,179.821 D12.2 ; GP1.35@121.412,177.659 121.412,179.451 D12.2 ; R35.2 123.042,181.195 C6.2 D12.2
ZCD1: GP1.4 Q3.1 R11.1 U2.4 | length 38.5
  Top Layer w0.19: U2.4 107.542,132.779 107.542,138.802 R11.1 108.439,139.699 Q3.1 ; R11.1 108.243,155.05 107.443,155.85 107.443,158.849 108.042,159.449 114.243,159.449 115.421,158.268 GP1.4@116.333,158.268
ZCD2: GP1.5 Q5.1 R18.1 U4.4 | length 76.6
  Top Layer w0.19: GP1.5@118.872,156.659 117.762,155.549 110.742,155.549 109.542,154.349 109.542,143.549 109.542,142.349 110.742,141.149 111.242,140.649 117.742,140.649 119.642,140.649 v1(119.942,140.349) ; v1(151.542,137.849) 152.843,137.849 152.843,137.884 ; U4.4 152.842,132.979 152.842,138.802 R18.1 154.695,139.502 Q5.1
  Bottom Layer w0.19: v1(119.942,140.349) 120.443,139.848 143.041,139.848 145.043,137.849 v1(151.542,137.849)
pads on no net: FE.2 GP1. GP1.6 GP1.7 GP1.12 GP1.14 GP1.15 GP1.16 GP1.17 GP1.19 GP1.20 GP1.21 GP1.22 GP1.24 GP1.25 GP1.30 GP1.34 GP1.37 GP1.41 GP1.42 GP1.43 GP1.44 GP1.45 GP1.46 GP1.47 GP1.48 GP1.49 GP1.50 SW1.3 SW2.3 SW3.4 U1.3 U1.5 U3.3 U3.5 U6.

## Polygon pours and split planes (outlines as drawn)
FE on Bottom Layer (solid): 103.942,132.349 105.942,130.349 133.842,130.349 157.942,130.349 159.942,132.349 159.942,154.349 156.942,157.349 152.642,157.349 149.942,160.049 149.842,173.949 152.442,176.549 152.442,179.249 150.942,180.649 150.942,189.349 149.942,190.349 113.942,190.349 112.942,189.349 112.942,180.949 111.342,179.349 104.942,179.349 103.942,178.349 103.942,132.349
FE on Top Layer (solid): 103.942,131.349 104.542,130.749 159.342,130.749 159.942,131.349 159.942,154.349 156.942,157.249 152.742,157.249 149.942,160.049 149.842,173.949 152.442,176.649 152.442,179.249 150.942,180.649 150.942,189.349 149.942,190.349 113.942,190.349 112.942,189.349 112.942,180.349 111.942,179.349 104.942,179.349 103.942,178.349 103.942,131.349

## Keep-outs
Keep-Out Layer:
  lines w0.19 net S$2341: 102.942,109.045 ccw(c104.942,109.045) 104.942,107.045 ; 102.942,178.352 cw(c104.942,178.352) 104.942,180.352 ; 109.441,107.044 cw(c109.441,105.044) 111.441,105.044 ; 109.942,180.349 ccw(c109.942,182.349) 111.942,182.349 ; 111.942,188.353 cw(c113.942,188.353) 113.942,190.353 ; 149.941,190.349 cw(c149.941,188.349) 151.941,188.349 ; 151.942,182.348 ccw(c153.942,182.348) 153.942,180.348 ; 152.442,105.047 cw(c154.442,105.047) 154.442,107.047 ; 158.942,180.349 cw(c158.942,178.349) 160.942,178.349

## Silkscreen, mask and mechanical layers (free items; w line width, h text height)
Top Overlay:
  lines w0.19 net S$260024: 153.042,142.349 153.042,143.449
  lines w0.19 net S$260028: 152.242,142.349 153.842,142.349
  lines w0.19 net S$260032: 152.642,141.949 153.442,141.949
  lines w0.19 net S$260036: 153.042,141.549 153.052,141.549
  text "Water Heater" at 104.742,151.733 h2.03
  text "V1.1" at 104.842,147.233 h2.03
  text "A2" at 114.466,118.828 h1.5
  text "A2" at 147.153,117.761 h1.5
  text "L3" at 114.611,114.577 h1.5
  text "L3" at 147.542,114.399 h1.5
  text "G" at 147.842,110.799 h1.5 r180
  text "G" at 115.983,110.212 h1.5 r180
  text "L1/A1" at 114.425,105.885 h1.5 r5
  text "L2/A1" at 143.894,105.901 h1.5 r4
Bottom Overlay:
  text "Copyright (C) 2022 / Gorm Rose / Licensed under  / CERN-OHL-S-2.0. / ohwr.org/cernohl / github.com/gormr" at 141.442,171.899 h1.5
Bottom Paste:
  lines w0.6 net S$241067: 166.542,115.099 166.542,116.499
  lines w0.6 net S$241069: 166.542,115.099 166.542,116.499
Top Solder:
  text "Copyright (C) 2022 / Gorm Rose / Licensed under  / CERN-OHL-S-2.0. / ohwr.org/cernohl / github.com/gormr" at 134.042,170.749 h0.8
Mechanical 1:
  text "Copyright Gorm Rose 2022. /  / This documentation describes Open Hardware and is licensed under the CERN-OHL-S-2.0. /  / You may redistribute and modify this documentation under the terms of the CERN-OHL-S-2.0.  / (http://ohwr.org/cernohl). This documentation is distributed WITHOUT ANY EXPRESS OR IMPLIED  / WARRANTY, INCLUDING OF MERCHANTABILITY, SATISFACTORY QUALITY AND FITNESS FOR A PARTICULAR PURPOSE.  / Please see the CERN-OHL-S-2.0 for applicable conditions." at 38.1,46.133 h2.03 r359
Document:
  text "Copyright Gorm Rose 2022. /  / This documentation describes Open Hardware and is licensed under the CERN-OHL-S-2.0. /  / You may redistribute and modify this documentation under the terms of the CERN-OHL-S-2.0.  / (http://ohwr.org/cernohl). This documentation is distributed WITHOUT ANY EXPRESS OR IMPLIED  / WARRANTY, INCLUDING OF MERCHANTABILITY, SATISFACTORY QUALITY AND FITNESS FOR A PARTICULAR PURPOSE.  / Please see the CERN-OHL-S-2.0 for applicable conditions." at 38.1,46.132 h2.03 r359

## Text inside footprints (layer, text, board x,y; h text height)
D1: Top Overlay "+" at 108.154,113.161 h1.2 r45; Top Overlay "S" at 104.71,111.185 h1.2 r270; Top Overlay "S" at 107.21,111.185 h1.2 r270; Top Overlay "-" at 104.831,112.511 h1.2 r90
D8: Top Overlay "+" at 160.154,113.161 h1.2 r45; Top Overlay "S" at 156.71,111.185 h1.2 r270; Top Overlay "S" at 159.042,111.849 h1.2 r90; Top Overlay "-" at 156.831,112.511 h1.2 r90
U6: Top Overlay "SDA" at 138.342,183.949 h2.03 r90; Top Overlay "SCL" at 132.342,184.049 h2.03 r90; Top Overlay "VCC" at 130.442,183.949 h2.03 r90; Top Overlay "GND" at 127.742,183.849 h2.03 r91